# EAGLE board Wiegezelle (EAGLE 9.5.2)
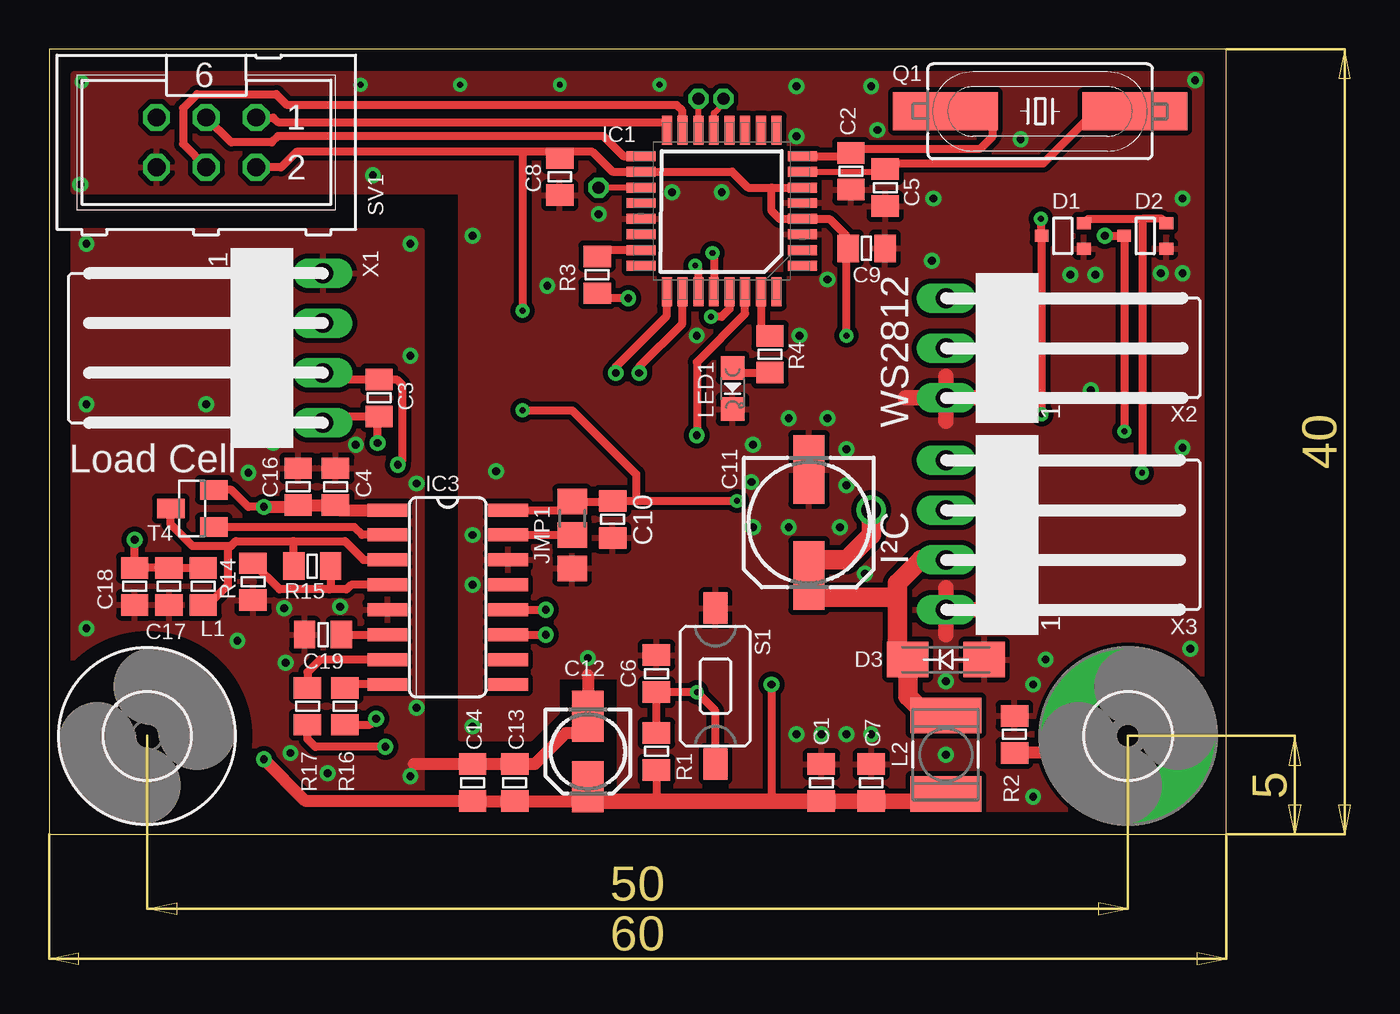
[diagram p0: board, top side]
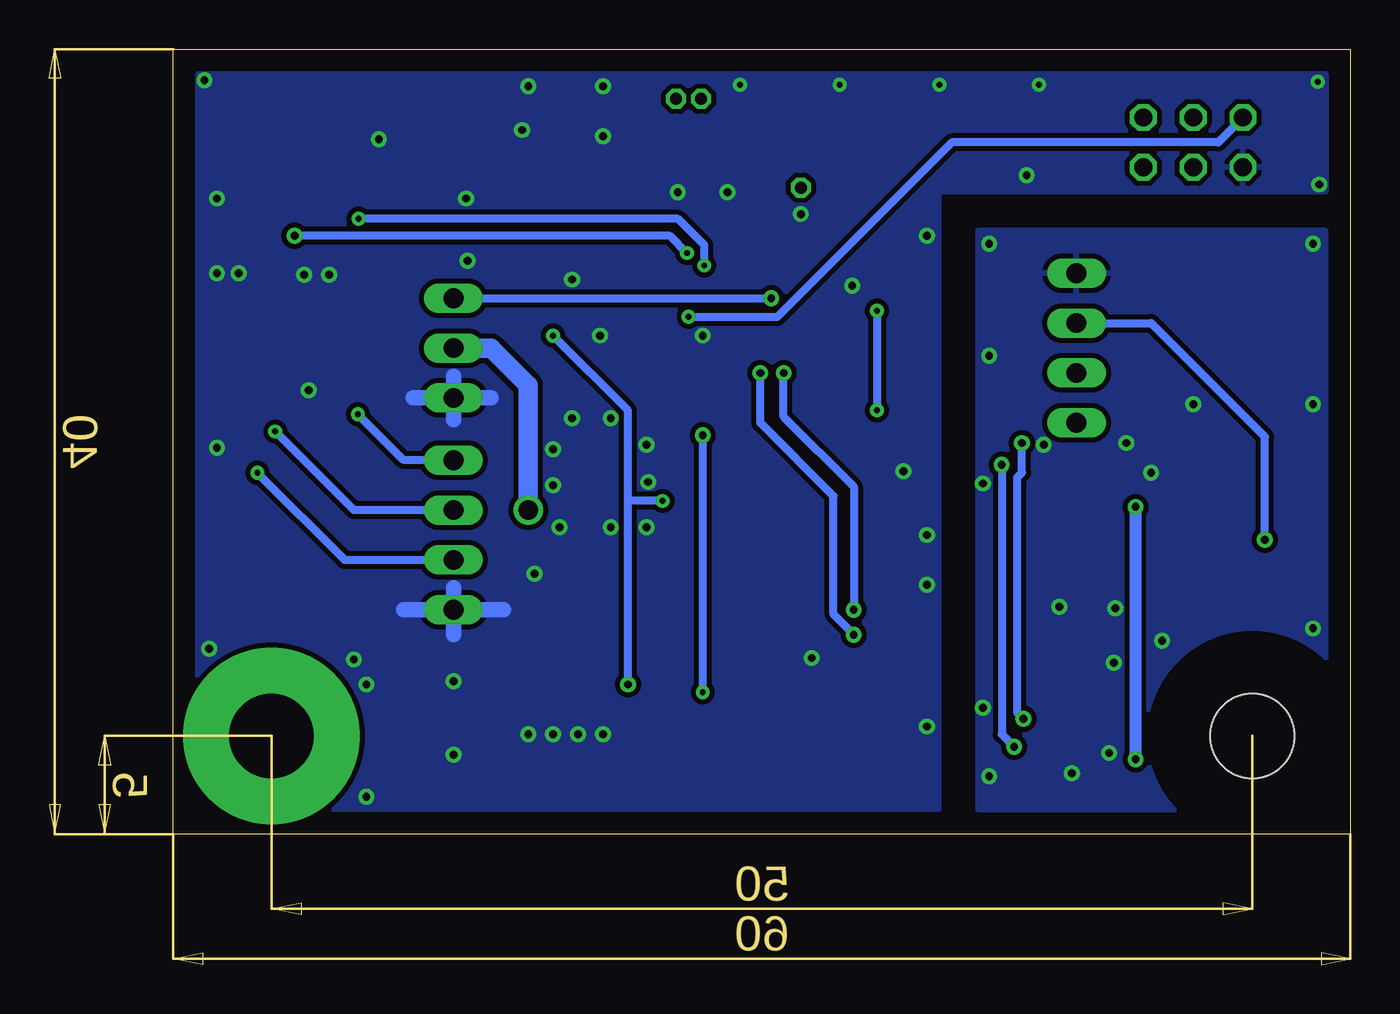
[diagram p1: board, bottom side, seen from below]

Size 60 x 40 mm. Coordinates in mm from the lower left corner, seen from the top.
Outline: 0,0 60,0 60,40 0,40 0,0
Copper layers (1*16): Top 0.035mm / dielectric 1.5mm / Bottom 0.035mm
Design rules "default": minimum track width 8mil, minimum drill 24mil, track to track 8mil, track to pad 8mil, pad to pad 8mil, via to via 8mil, smd to smd 8mil, copper to edge 40mil, drill to drill 8mil, minimum pad ring 8mil, minimum via ring 8mil, stop-mask expansion 0mil, vias tented up to drill 25mil, thermal gap 10mil
Net classes: 0 default: clearance 0.205 mm

## Footprints (pad centres in the part's own frame; a part is rotated, then mirrored left to right if it is on the bottom)
0805CRH = smd 1.092 x 1.397: 1 -0.94,0; 2 0.94,0
153CLV-0605 = smd 3.5 x 1.6: + 2.7,0; - -2.7,0
153CLV-0405 = smd 2.6 x 1.6: + 1.8,0; - -1.8,0
SOT323-3 = smd 0.6 x 0.7: 1 -0.65,-1.075; 2 0.65,-1.075; 3 0,1.075
SMA-DO214AC = smd 2.1 x 1.8: A -1.95,0; K 1.95,0
4,3-PAD = drill 4.3 pad 9: B4,3 0,0
4,3 = hole 4.3: 0,0
QFP80P900X900X120-32N = smd 1.473 x 0.508: 1 -4.115,2.794; 2 -4.115,2.007; 3 -4.115,1.194; 4 -4.115,0.406; 5 -4.115,-0.406; 6 -4.115,-1.194; 7 -4.115,-2.007; 8 -4.115,-2.794; 17 4.115,-2.794; 18 4.115,-2.007; 19 4.115,-1.194; 20 4.115,-0.406; 21 4.115,0.406; 22 4.115,1.194; 23 4.115,2.007; 24 4.115,2.794 | smd 0.508 x 1.473: 9 -2.794,-4.115; 10 -2.007,-4.115; 11 -1.194,-4.115; 12 -0.406,-4.115; 13 0.406,-4.115; 14 1.194,-4.115; 15 2.007,-4.115; 16 2.794,-4.115; 25 2.794,4.115; 26 2.007,4.115; 27 1.194,4.115; 28 0.406,4.115; 29 -0.406,4.115; 30 -1.194,4.115; 31 -2.007,4.115; 32 -2.794,4.115
SO16 = smd 0.66 x 2.032: 1 -4.445,-3.073; 2 -3.175,-3.073; 3 -1.905,-3.073; 4 -0.635,-3.073; 5 0.635,-3.073; 6 1.905,-3.073; 7 3.175,-3.073; 8 4.445,-3.073; 9 4.445,3.073; 10 3.175,3.073; 11 1.905,3.073; 12 0.635,3.073; 13 -0.635,3.073; 14 -1.905,3.073; 15 -3.175,3.073; 16 -4.445,3.073
A0R-JMP = smd 1.5 x 1.3: 1 0,1.7; 2 0,0; 3 0,-1.7
L4532P = smd 1.8 x 3.6: 1 -2,0; 2 2,0
CHIPLED_0805 = smd 1.2 x 1.2: A 0,-1.05; C 0,1.05
LSP06 = drill 0.61 octagon: MP 0,0
HC49UP = smd 5.334 x 1.93: 1 -4.826,0; 2 4.826,0
DTSM3XN = smd 1.6 x 1.2: 1 -3.97,0; 2 3.97,0
ML6 = drill 0.914 octagon: 1 -2.54,-1.27; 2 -2.54,1.27; 3 0,-1.27; 4 0,1.27; 5 2.54,-1.27; 6 2.54,1.27
SOT23-BEC = smd 1 x 1.4: B -0.95,-1.1; C 0,1.1; E 0.95,-1.1
NSL25-4W = drill 1 long: 1 -3.81,0; 2 -1.27,0; 3 1.27,0; 4 3.81,0
NSL25-3W = drill 1 long: 1 -2.54,0; 2 0,0; 3 2.54,0

## Placement (x,y rotation side)
C1  1n  [0805CRH]  39.37,2.62 90 top
C2  22p  [0805CRH]  40.88,33.77 90 top
C3  100n  [0805CRH]  16.83,22.23 90 top
C4  1u  [0805CRH]  14.61,17.7 90 top
C5  22p  [0805CRH]  42.62,32.94 90 top
C6  100n  [0805CRH]  30.96,8.18 90 top
C7  100n  [0805CRH]  41.91,2.62 90 top
C8  100n  [0805CRH]  26.04,33.5 270 top
C9  100n  [0805CRH]  41.67,29.84 0 top
C10  100n  [0805CRH]  28.73,16.03 270 top
C11  100u  [153CLV-0605]  38.73,15.88 270 top
C12  47u  [153CLV-0405]  27.46,4.21 270 top
C13  2u2  [0805CRH]  23.73,2.62 90 top
C14  100n  [0805CRH]  21.59,2.62 90 top
C16  100n  [0805CRH]  12.7,17.7 90 top
C17  100n  [0805CRH]  6.11,12.62 270 top
C18  10u  [0805CRH]  4.37,12.62 270 top
C19  100n  [0805CRH]  13.97,10.16 180 top
D1  NUP1301U_115  [SOT323-3]  51.67,30.48 90 top
D2  NUP1301U_115  [SOT323-3]  55.88,30.48 90 top
D3  SMAJ5.0CA  [SMA-DO214AC]  45.72,8.89 180 top
H1  MOUNT-PAD-ROUND4.3  [4,3-PAD]  55,5 0 top
H2  MOUNT-HOLE4.3  [4,3]  5,5 0 top
IC1  ATMEGA328P-AU  [QFP80P900X900X120-32N]  34.29,31.75 180 top
IC3  HX711  [SO16]  20.32,12.06 270 top
JMP1  0R-JUMPA  [A0R-JMP]  26.67,15.24 0 top
L1  3u3  [0805CRH]  7.86,12.62 90 top
L2  22u  [L4532P]  45.72,4.05 90 top
LED1  YE  [CHIPLED_0805]  34.85,22.7 180 top
LSP1  LSP06  [LSP06]  28.02,32.94 90 top
LSP2  LSP06  [LSP06]  34.37,37.47 90 top
LSP3  LSP06  [LSP06]  33.1,37.47 90 top
Q1  16MHz  [HC49UP]  50.52,36.83 0 top
R1  10k  [0805CRH]  30.96,4.21 90 top
R2  0R  [0805CRH]  49.21,5.08 270 top
R3  470R  [0805CRH]  27.94,28.5 270 top
R4  220R  [0805CRH]  36.75,24.45 270 top
R14  1k  [0805CRH]  10.4,12.86 270 top
R15  2k2  [0805CRH]  13.41,13.65 0 top
R16  100R  [0805CRH]  15.08,6.51 270 top
R17  100R  [0805CRH]  13.18,6.51 270 top
S1  SMD_TASTER_EBAY  [DTSM3XN]  33.97,7.54 90 top
SV1  ATMEL_ISP_6  [ML6]  8.02,35.24 180 top
T4  BC807-16SMD  [SOT23-BEC]  7.3,16.59 90 top
X1  NSL25-4W  [NSL25-4W]  13.97,24.77 270 top
X2  NSL25-3W  [NSL25-3W]  45.72,24.77 90 top
X3  NSL25-4W  [NSL25-4W]  45.72,15.24 90 top

## Library data of the parts
C1-C14 C16-C19 R1-R4 R14-R17 = rcl_jci
D1 D2 = Diode
D3 = Eltra_Teile
H1 H2 = holes_sv
IC1 = Atmel; PACKAGE: TQFP-32; SUPPLIER: Atmel
IC3 = ADC
JMP1 = jump-0r-smd
L1 L2 = rcl_sv
LED1 = led_jci
LSP1-LSP3 = solpad_jci
Q1 = crystal_jci
S1 = switch
SV1 = isp_jci
T4 = transistor_sv
X1-X3 = con-nsk_jci

## Nets
AGND: C4.2 C12.- C13.2 C14.2 C16.2 C17.2 C18.2 C19.2 IC3.5 R14.2 X1.1
GND: C1.2 C2.1 C5.1 C6.2 C7.2 C8.2 C9.2 C10.2 C11.- D1.1 D2.1 D3.A IC1.3 IC1.5 IC1.21 IC3.14 JMP1.3 LED1.C R2.1 S1.2 SV1.6 X2.1 X3.1
HX711_DT: IC1.25 IC3.12
HX711_SCK: IC1.26 IC3.11
INA+: IC3.8 R16.1
INA-: IC3.7 R17.1
LED: IC1.31 R4.1
LED_DATA: IC1.23 R3.1
MISO: IC1.16 SV1.1
MOSI: IC1.15 SV1.4
N$1: H1.B4,3 R2.2
N$2: LED1.A R4.2
N$3: R3.2 X2.3
N$4: C5.2 IC1.7 Q1.2
N$5: C2.2 IC1.8 Q1.1
N$6: IC1.19 LSP1.MP
N$7: IC1.13 LSP2.MP
N$8: IC1.14 LSP3.MP
N$12: IC3.15 JMP1.2
N$13: C19.1 IC3.6
N$14: IC3.2 T4.B
N$16: IC3.4 R14.1 R15.2
N$18: C3.1 R16.2 X1.4
N$19: C3.2 R17.2 X1.3
RESET: IC1.29 SV1.5
SCK: IC1.17 SV1.3
SCL: D2.3 IC1.28 X3.3
SDA: D1.3 IC1.27 X3.4
TASTER: C6.1 IC1.30 R1.2 S1.1
VAVDD: C17.1 C18.1 L1.2 X1.2
VAVDD_1: IC3.3 L1.1 R15.1 T4.C
VCC: C1.1 C4.1 C7.1 C8.1 C9.1 C10.1 C12.+ C13.1 C14.1 C16.1 IC1.4 IC1.6 IC1.18 IC3.1 IC3.16 JMP1.1 L2.1 R1.1 SV1.2 T4.E
VCC_INPUT: C11.+ D1.2 D2.2 D3.K L2.2 X2.2 X3.2

## Tracks (layer width: path | path; a pad name or v marks a point on that pad's centre or on a via)
AGND  (via drill 0.4)
  Top 0.6: 18.59,3.56 C14.2 C13.2 24.75,3.56 26.35,5.16 27.94,5.16 C12.-
  other vias: 1.91,30.08 18.41,30.08 18.41,24.37 10.16,18.41 1.91,10.48 9.6,9.84 14.21,3.1 18.41,2.94 14.84,11.59 1.91,21.91 8.02,21.91 11.99,11.51 12.06,8.73 12.3,4.13 18.73,6.43 18.73,17.86 15.64,19.84 11.43,19.92
  pour Bottom (isolate 0.254): 19,1.27 1.27,1.27 1.27,30.73 19,30.73
  pour Top (isolate 0.254): 19,1.27 1.27,1.27 1.27,30.73 19,30.73
GND  (via drill 0.3, 0.4)
  Top 0.6: 27.46,8.11 27.46,7.06
  Top 0.8: X2.1 43.66,22.23 | X2.1 47.78,22.23 | X2.1 45.72,23.34 | X2.1 45.72,21.03 | X3.1 45.72,12.54 | X3.1 45.72,10.16 | X3.1 48.26,11.43
  Bottom 0.8: X2.1 45.72,21.11 | X2.1 45.72,23.34 | X2.1 43.81,22.23 | X2.1 47.78,22.23 | X3.1 48.26,11.43 | X3.1 43.18,11.43 | X3.1 45.72,12.54 | X3.1 45.72,10.16
  other vias: 21.59,5.48 27.46,8.97 40.64,17.78 38.26,25.4 45.09,32.38 38.1,35.56 1.59,33.1 21.59,30.48 28.02,31.59 57.78,19.68 58.18,9.45 50.16,1.91 34.29,32.7 31.75,32.7 38.1,5.08 39.37,5.08 40.64,5.08 41.91,5.08 22.78,18.49 57.78,32.38 49.53,35.4 53.1,22.62 26.04,38.18 50.16,7.62 50.8,8.89 16.51,33.58 25.4,27.94 33.02,25.4 39.69,28.26 45.72,7.78 45.72,4.05 52.07,28.5 53.34,28.5 56.67,28.57 57.78,28.57 45.01,29.21 58.42,38.42 38.1,38.1 41.91,38.1 42.23,35.88 31.11,38.18 20.95,38.18 15.88,38.18 1.67,38.34 21.59,12.7 21.59,15.24 35.88,19.84 40.64,19.61 40.32,15.64 37.7,15.64 39.69,21.19 35.8,17.94 35.88,15.64 41.59,13.26 37.7,21.19
  pour Top (isolate 0.254): 1.27,38.73 58.73,38.73 58.73,1.27 29.1,1.27 29.1,8.02 25.88,8.02 25.88,6.19 24.53,4.86 21,4.86 21,32.73 1.27,32.73
  pour Bottom (isolate 0.254): 58.73,38.73 1.27,38.73 1.27,32.73 21,32.73 21,1.27 58.73,1.27
HX711_DT  (via drill 0.4)
  Top 0.4: IC3.12 v25.32,11.43 | v28.89,23.5 28.89,23.81 31.5,26.42 IC1.25
  Bottom 0.4: v25.32,11.43 25.32,17.7 28.89,21.27 v28.89,23.5
HX711_SCK  (via drill 0.4)
  Top 0.4: IC3.11 v25.32,10.16 | IC1.26 32.28,26.01 30.08,23.81 v30.08,23.5
  Bottom 0.4: v25.32,10.16 26.35,11.19 26.35,17.22 30.08,20.95 v30.08,23.5
INA+
  Top 0.4: IC3.8 15.25,7.62 R16.1
INA-
  Top 0.4: IC3.7 13.81,8.89 13.18,8.26 R17.1
LED
  Top 0.4: IC1.31 36.3,25.84 R4.1
LED_DATA
  Top 0.4: IC1.23 28.25,29.74 R3.1
MISO
  Top 0.4: SV1.1 11.43,36.51 11.67,36.27 31.5,36.27 IC1.16
MOSI
  Top 0.4: IC1.15 32.28,36.85 31.99,37.15 12.14,37.15 11.59,37.7 7.54,37.7 6.83,36.99 6.83,35.16 SV1.4
N$1
  Top 0.6: H1.B4,3 54.14,4.14 R2.2
N$2
  Top 0.4: LED1.A 35.09,23.51 R4.2
N$3  (via drill 0.4)
  Top 0.4: v29.53,27.3 28.19,27.3 R3.2
  Bottom 0.4: X2.3 v29.53,27.3
N$4
  Top 0.305: IC1.7 42.5,33.76
  Top 0.4: 42.5,33.76 C5.2 42.91,34.17 50.68,34.17 53.34,36.83 Q1.2
N$5
  Top 0.4: IC1.8 40.71,34.54 C2.2 41.09,34.92 47.47,34.92 48.1,35.56 48.1,36.04 47.31,36.83 Q1.1
N$6
  Top 0.3: IC1.19 LSP1.MP
N$7
  Top 0.3: IC1.13 33.88,36.74 34.37,37.23 LSP2.MP
N$8
  Top 0.3: IC1.14 LSP3.MP
N$12
  Top 0.4: IC3.15 JMP1.2
N$13
  Top 0.4: C19.1 IC3.6
N$14
  Top 0.4: IC3.2 15.95,15.24 15.56,15.64 8.48,15.64
  Top 0.6: 8.48,15.64 T4.B
N$16
  Top 0.4: IC3.4 15.4,12.7 15.16,12.46 14.29,12.46 | 14.29,12.46 11.75,12.46 R14.1 | R15.2 14.35,12.53 14.29,12.46
N$18  (via drill 0.4)
  Top 0.4: X1.4 14.3,21.29 C3.1 16.75,21.21 v16.75,19.92 | R16.2 16.36,5.57 v16.67,5.87
  Bottom 0.4: v16.67,5.87 16.99,6.19 16.99,18.18 16.75,18.41 v16.75,19.92
N$19  (via drill 0.4)
  Top 0.4: X1.3 14.3,23.16 C3.2 17.71,23.16 18.02,22.86 18.02,19.05 v17.78,18.81 | v17.14,4.45 13.57,4.45 13.18,4.84 R17.2
  Bottom 0.4: v17.78,18.81 17.78,5.08 v17.14,4.45
RESET  (via drill 0.3)
  Top 0.4: IC1.29 34.7,26.76 34.29,26.35 v33.73,26.35
  Bottom 0.4: SV1.5 6.75,35.24 20.32,35.24 29.21,26.35 v33.73,26.35
SCK
  Top 0.4: 30.18,34.59 IC1.17 29.27,34.54 28.26,35.56 11.67,35.56 11.35,35.24 9.29,35.24 SV1.3
SCL  (via drill 0.3, 0.4)
  Top 0.4: v53.82,30.48 D2.3 v54.8,20.52 | v33.81,29.61 33.88,29.54 IC1.28
  Bottom 0.4: X3.3 50.8,16.51 v54.8,20.52 | v53.82,30.48 34.69,30.48 v33.81,29.61
SDA  (via drill 0.3)
  Top 0.4: IC1.27 33.1,28.81 32.86,29.05 v32.94,28.97 | v50.56,31.35 50.56,30.52 D1.3 v50.6,21.39
  Bottom 0.4: X3.4 48.26,19.05 v50.6,21.39 | v50.56,31.35 34.29,31.35 32.94,30 v32.94,28.97
TASTER  (via drill 0.3, 0.4)
  Top 0.4: R1.2 C6.1 30.97,7.22 v33.02,7.22 33.97,6.27 S1.1 | IC1.30 35.48,26.51 33.02,24.05 v33.02,20.32
  Bottom 0.4: v33.02,20.32 v33.02,7.22
VAVDD  (via drill 0.4)
  Top 0.4: L1.2 C17.1 C18.1 v4.37,15
  Bottom 0.4: X1.2 10.16,26.04 4.37,20.24 v4.37,15
VAVDD_1
  Top 0.4: 6.27,16.59 T4.C | 6.19,16.43 6.19,15.8 7.3,14.68 9.13,14.68 | 9.13,14.68 9.29,14.68 9.53,14.92 12.46,14.92 | 12.46,14.92 15.08,14.92 16.03,13.97 IC3.3 | R15.1 12.47,14.91 12.46,14.92 | 9.13,14.68 9.13,12.7 8.11,11.68 L1.1
  Top 0.6: 6.19,16.43 6.2,16.42 T4.C
VCC  (via drill 0.3, 0.4)
  Top 0.4: v10.95,16.67 10.16,16.67 9.29,17.54 T4.E | v36.83,7.62 36.83,1.67 | R1.1 30.96,1.67 | 36.83,32.94 36.83,31.75 37.24,31.34 IC1.4 39.78,31.34 40.64,30.48 40.64,30.31 C9.1 40.64,29.75 v40.64,25.4 | IC3.16 26.24,16.51 JMP1.1 28.7,16.94 C10.1 v35.07,16.97 35.08,16.99 | 24.13,34.77 25.7,34.77 C8.1 26.1,34.44 26.43,34.77 27.7,34.77 28.71,33.76 IC1.18 34.82,33.76 35.64,32.94 36.83,32.94 | 24.13,34.77 12.62,34.77 11.83,33.97 SV1.2 | 36.83,32.94 IC1.6 | 24.13,34.77 v24.13,26.67 | v24.13,21.59 26.67,21.59 29.92,18.34 29.92,16.99
  Top 0.6: v10.95,16.67 12.69,16.67 C16.1 C4.1 14.78,16.51 IC3.1 | v10.95,3.81 13.08,1.68 C14.1 C13.1 27.48,1.68 28.03,1.68
  Top 0.8: 27.48,1.68 C12.+ 27.46,1.67 30.96,1.67 36.83,1.67 39.37,1.67 C1.1 | L2.1 45.35,1.68 C7.1 C1.1 | C1.1 39.36,1.67
  Bottom 0.4: v36.83,7.62 36.83,16.99 | 36.83,16.99 36.83,21.59 v40.64,25.4 | v35.07,16.97 35.08,16.99 36.83,16.99 | v24.13,26.67 v24.13,21.59
  Bottom 0.6: v10.95,16.67 v10.95,3.81
VCC_INPUT  (via drill 0.3, 1)
  Top 0.4: D1.2 52.97,31.35 55.72,31.35 | D2.2 56.73,31.35 55.72,31.35 | 55.72,31.35 v55.72,18.41
  Top 1: 43.26,12.06 43.26,12.78 44.45,13.97 X3.2 | 43.26,12.06 43.26,9.4 D3.K 43.77,7.03 44.75,6.05 L2.2 | 43.26,12.06 38.73,12.06 C11.+ 38.73,13.97 40.64,13.97 41.91,15.24 v41.91,16.51
  Bottom 0.4: v55.72,18.41 51.28,13.97 X3.2
  Bottom 1: X2.2 43.81,24.77 41.91,22.86 v41.91,16.51

## Text on the board
tPlace: WS2812 | Load Cell | I²C